# Altium PCB PCB1.PcbDoc
Units mil, origin at the board's own origin, x right, y up, seen from the top; angles counter-clockwise.
Board outline 790 x 1190 mil, 2 copper layers (Top Layer, Bottom Layer); 7 components, 6 nets, 16 pads, 0 vias.
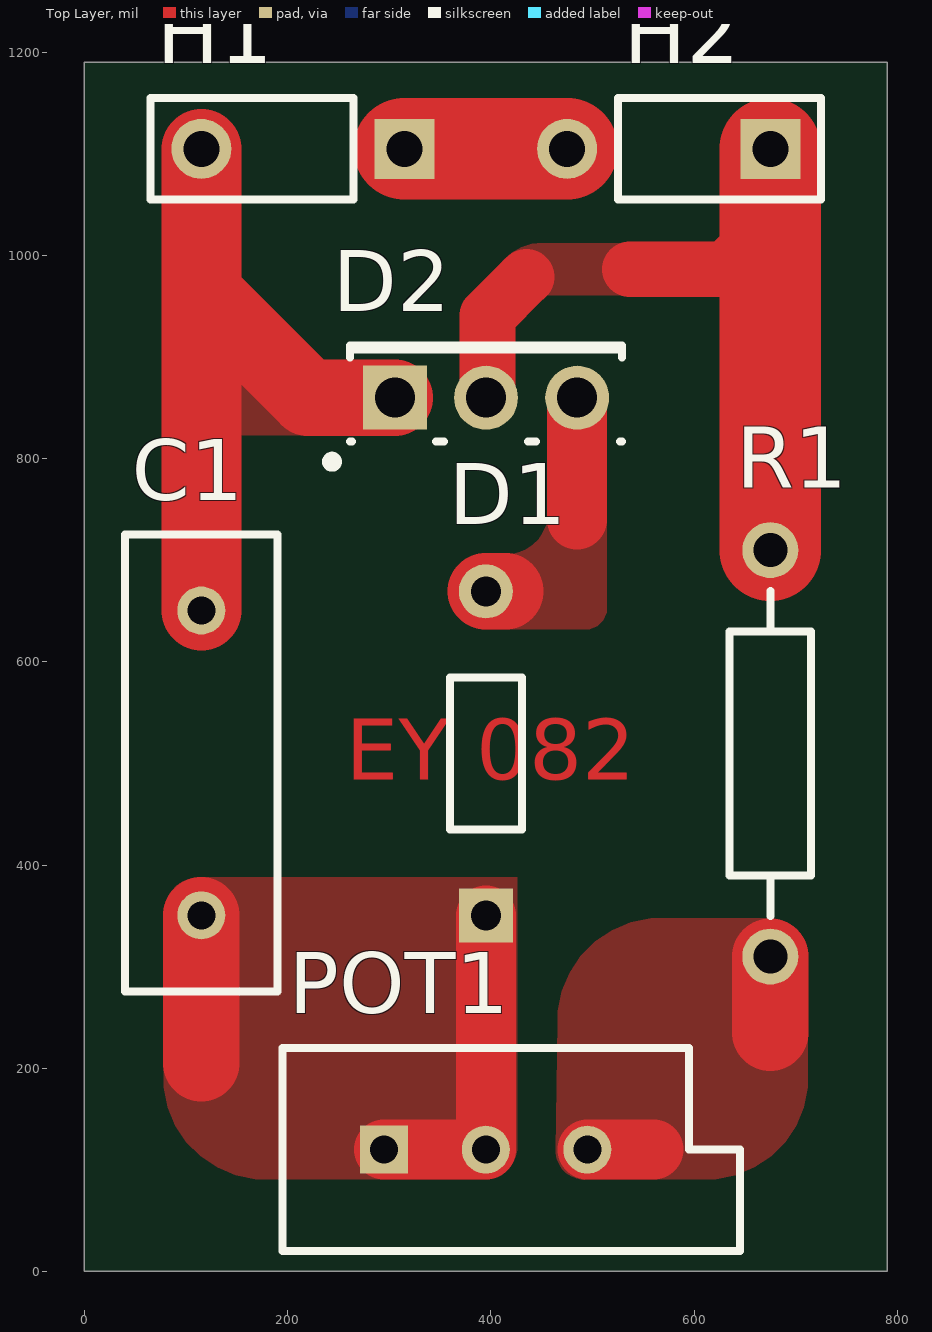
[diagram p0: Top Layer view]
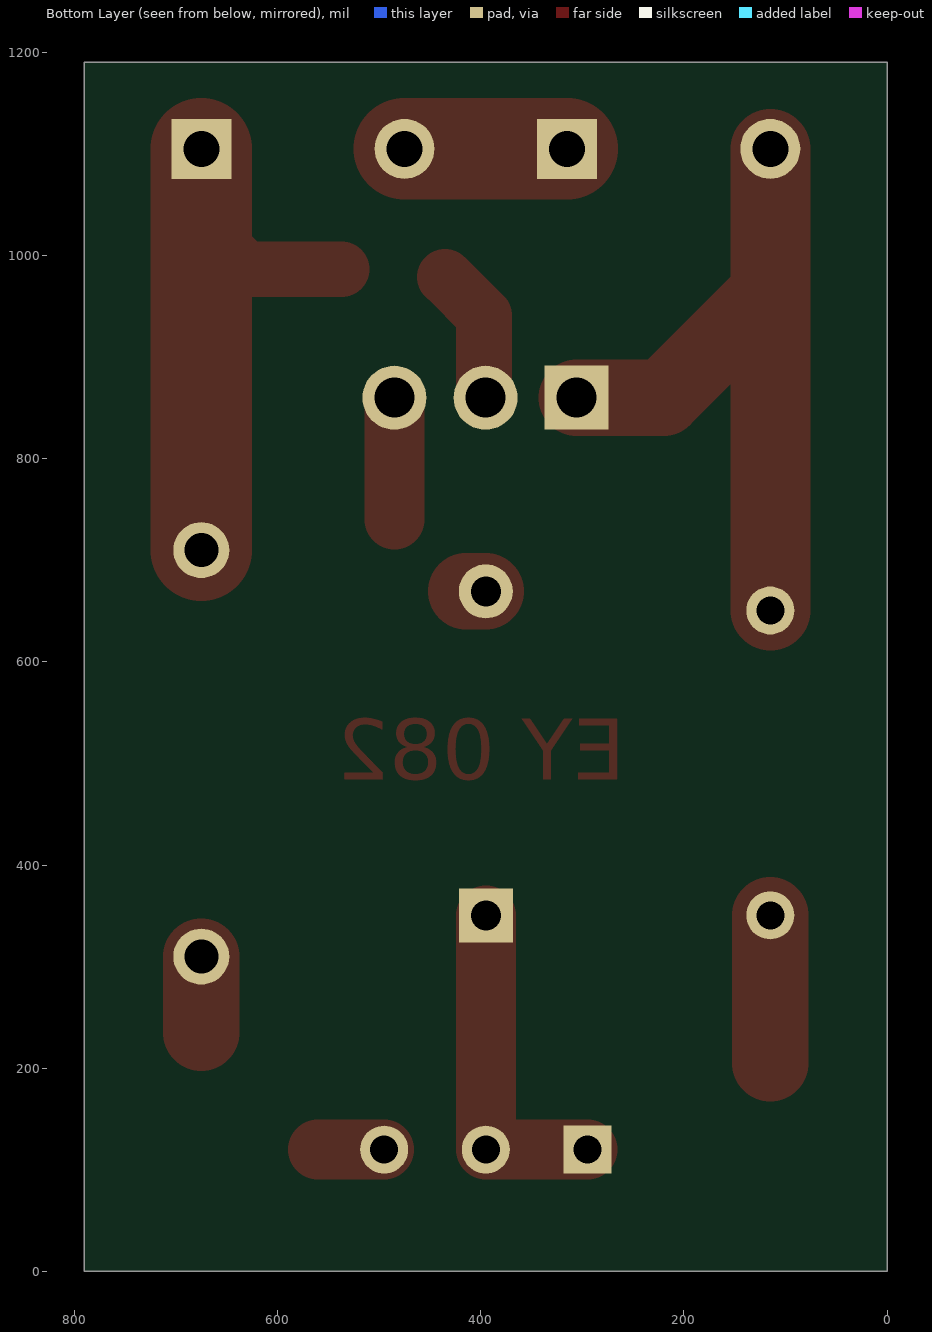
[diagram p1: Bottom Layer view, seen from below]

## Layer stack, top to bottom
Top Solder: solder mask 0.4, Solder Resist, Dk 3.5
Top Layer: signal copper 1.4
Dielectric 1: dielectric 12.6, FR-4, Dk 4.8
Bottom Layer: signal copper 1.4
Bottom Solder: solder mask 0.4, Solder Resist, Dk 3.5

## Board outline
0,0 790,0 790,1190 0,1190

## Design rules (kind name [scope] priority, off if disabled: settings)
Clearance [All] p1: gap=10 ignorepadtopadclearanceinfootprint=FALSE except(0: Arc-Hole Track-Hole SMDPad-Hole THPad-Hole Via-Hole Fill-Hole Poly-Hole Region-Hole Text-Hole)
PlaneConnect [All] p1: planeconnectstyle=Direct reliefexpansion=20 reliefentries=4 reliefconductorwidth=10 reliefairgap=10
PolygonConnect [All] p1: connectstyle=Direct reliefconductorwidth=10 reliefentries=4 polygonreliefangle="90 Angle" airgapwidth=10
RoutingVias [All] p1: holewidth=28 width=50 viastyle="Through Hole" minholewidth=28 minwidth=50 maxholewidth=28 maxwidth=50
SolderMaskExpansion [All] p1: expansion=4
Width [All] p1: maxlimit=100 minlimit=55 preferedwidth=75 minimp=50.000000 maximp=50.000000 favimp=50.000000
29 further rules are at their usual default settings.

## Components (designator, comment, footprint, x,y, rotation, side; value= is the part's Value field where it differs from the comment)
C1 "Cap" RAD-0.3 115,500.55 r90 top value=100pF
D1 "DB3TG" *DIOAD810W51L378D176P 395,510 r90 top
D2 "Triac" 369-03 395.24,860 r0 top
H1 "Power Source" HDR1X2#1 215,1105 r180 top
H2 "Lamp" HDR1X2#2 675,1105 r180 top
POT1 "RPot" VR5 395,120 r0 top value=1K
R1 "Res2" AXIAL-0.4 675,510 r90 top value=1K

## Footprints (in the part's own frame and the unit in brackets; to place one, negate y for a bottom-side part, rotate by r counter-clockwise, add the part's x,y. Pads: shape width x height; smd on the part's side, far side on the other; paste and mask are expansions set on the pad)
369-03 [mm] "TO, Thru-Hole, Vertical, Heatsink Mounted; 3 In-Line Leads; Pitch 2.28 mm"
  rect 1.6x1.6 hole 1: 1(-2.28,0)
  round 1.6 hole 1: 2(0,0) 3(2.28,0)
  silkscreen extent -3.97,-1.72 3.4,1.3, body extent -3.45,-1.15 3.45,1.35, height 9.7
*DIOAD810W51L378D176P [mm]
  rect 1.35x1.35 hole 0.75: 1(-4.05,0)
  round 1.35 hole 0.75: 2(4.05,0)
  silkscreen extent -1.9,-0.9 1.9,0.9
AXIAL-0.4 [mm] "Axial Device, Thru-Hole; 2 Leads; 0.4 in Pin Spacing"
  round 1.4 hole 0.85: 1(-5.08,0) 2(5.08,0)
  silkscreen extent -4.06,-1.02 4.06,1.02
HDR1X2#1 [mm] "Connector; Header; 2 Position"
  rect 1.5x1.5 hole 0.9: 1(-2.54,0)
  round 1.5 hole 0.9: 2(2.54,0)
  silkscreen extent -1.27,-1.27 3.81,1.27
HDR1X2#2 [mm] "Connector; Header; 2 Position"
  rect 1.5x1.5 hole 0.9: 1(0,0)
  round 1.5 hole 0.9: 2(5.08,0)
  silkscreen extent -1.27,-1.27 3.81,1.27
RAD-0.3 [mm] "Radial Cap, Thru-Hole; 2 Leads; 0.3 in Pin Spacing"
  round 1.2 hole 0.7: 1(-3.81,0) 2(3.81,0)
  silkscreen extent -5.71,-1.91 5.71,1.91
VR5 [mm] "Thru-Hole; 3 Leads"
  rect 1.2x1.2 hole 0.7: 1(-2.54,0)
  round 1.2 hole 0.7: 2(0,0) 3(2.54,0)
  silkscreen extent -5.08,-2.54 6.35,2.54

## Part data
C1: "Capacitor", LatestRevisionDate=17-Jul-2002, LatestRevisionNote="Re-released for DXP Platform.", PackageDescription="Radial Cap, Thru-Hole; 2 Leads; 0.3 in Pin Spacing", PackageReference=RAD-0.3, Published=8-Jun-2000, Publisher="Altium Limited"
D1: "Rectifier Diode, 30 V, 34 V, 15 A, 2 A, DO-204AH, 2", Package="DO-35 STMicroelectronics", Availability=Unavailable, MF="ON Semiconductor", MP=DB3TG, Price=None, SnapEDA_Link=https://www.snapeda.com/parts/DB3TG/ON%20Semiconductor/view-part/?ref=snap
D2: "Silicon Bidirectional Triode Thyristor", ComponentLink1Description="Manufacturer Link", ComponentLink1URL=http://www.motorola.com/, DatasheetVersion=1999, LatestRevisionDate=17-Jul-2002, LatestRevisionNote="Re-released for DXP Platform.", Note="Pin 2 is electrically connected to Pin 4 (TAB)", PackageDescription="TO, Thru-Hole, Vertical, Heatsink Mounted; 3 In-Line Leads; Pitch 2.28 mm", PackageReference=369-03, Published=29-Sep-2000, Publisher="Altium Limited"
H1 H2: library part "Header 2", "Header, 2-Pin", LatestRevisionDate=17-Jul-2002, LatestRevisionNote="Re-released for DXP Platform.", Publisher="Altium Limited"
POT1: "Potentiometer", LatestRevisionDate=17-Jul-2002, LatestRevisionNote="Re-released for DXP Platform.", PackageDescription="Variable Resistor, Thru-Hole; 3 Leads", PackageReference=VR5, Published=8-Jun-2000, Publisher="Altium Limited", Set Position=0.5, Sim Note="Enter the Resistance value and the set point into parameter fields."
R1: "Resistor", LatestRevisionDate=17-Jul-2002, LatestRevisionNote="Re-released for DXP Platform.", PackageDescription="Axial Device, Thru-Hole; 2 Leads; 0.4 in Pin Spacing", PackageReference=AXIAL-0.4, Published=8-Jun-2000, Publisher="Altium Limited"

## Nets (pads, with @x,y where several pads share a name; then routed paths per layer and width w, separated by ;. In a path a pad name is that pad's centre, name@x,y a point inside that pad or via, vN(x,y) a via of type N, cw(c..) or ccw(c..) an arc to the next point about the centre after c; other vN are vias at no path point)
NetC1_1: C1.1 D1.1 POT1.1 POT1.2 | length 476.1
  Top Layer w59.06: POT1.1 POT1.2 D1.1
  Top Layer w75: 115,205 C1.1
NetC1_2: C1.2 D2.1 H1.2 | length 688.4
  Top Layer w75: 115,965 220,860 D2.1
  Top Layer w78.74: C1.2 115,965 H1.2
NetD1_2: D1.2 D2.3 | length 139.4
  Top Layer w59.06: 485,740 D2.3
  Top Layer w75: D1.2 D1.2@414.45,669.45
NetD2_2: D2.2 H2.1 R1.2 | length 686.5
  Top Layer w55: D2.2 396.77,861.53 396.77,940.77 435,979 ; 537,986.5 631.5,986.5 675,1030
  Top Layer w100: R1.2 675,1030 H2.1
NetH1_1: H1.1 H2.2 | length 160
  Top Layer w100: H1.1 H2.2
NetPOT1_2: POT1.3 R1.1 | length 140
  Top Layer w59.06: POT1.3 560,120
  Top Layer w75: 675,235 R1.1

## Polygon pours and split planes (outlines as drawn)
NetD2_2 on Top Layer "Top Layer-NetD2_2" (solid, pour order 26): 456,961 537,961 537,1012 445.89,1012 ccw(c452.78,957) 409,991
NetC1_1 on Top Layer "Top Layer-NetC1_1" (solid, pour order 24): 114,388 ccw(c114,352) 78,352 78,191 ccw(c178,191) 178,91 393.5,91 ccw(c393.82,123.18) 426,122.86 426,388
NetC1_2 on Top Layer "Top Layer-NetC1_2" (solid, pour order 14): 196,823
NetD1_2 on Top Layer "Top Layer-NetD1_2" (solid, pour order 12): 514,753 514,653 cw(c493,653) 493,632 393,632 cw(c393,647) 378,647 378,694 cw(c390,694) 390,706 416,706 ccw(c416,746) 456,746
NetD1_2 on Top Layer "Top Layer-NetD1_2 1" (solid, pour order 10): 513,765
NetC1_2 on Top Layer "Top Layer-NetC1_2 1" (solid, pour order 8): 223,823 133,823 133,905 134,906
NetPOT1_2 on Top Layer "Top Layer-NetPOT1_2" (solid, pour order 6): 561,91 612,91 ccw(c612,191) 712,191 712,310 ccw(c675.25,310.75) 676,347.5 567.5,347.5 ccw(c567.5,246) 466,246 464,119 ccw(c492.5,119) 492.5,90.5
NetC1_1 on Top Layer "Top Layer-NetC1_1 1" (solid, pour order 0): 75,215

## Other copper
Top Layer:
  text "EY 082" at 257,484 h60